# Altium PCB RADIOMASTER.PcbDoc
Units mm, origin at the board's own origin, x right, y up, seen from the top; angles counter-clockwise.
Board outline 23 x 50 mm, 2 copper layers (Top Layer, Bottom Layer); 28 components, 32 nets, 100 pads, 18 vias.
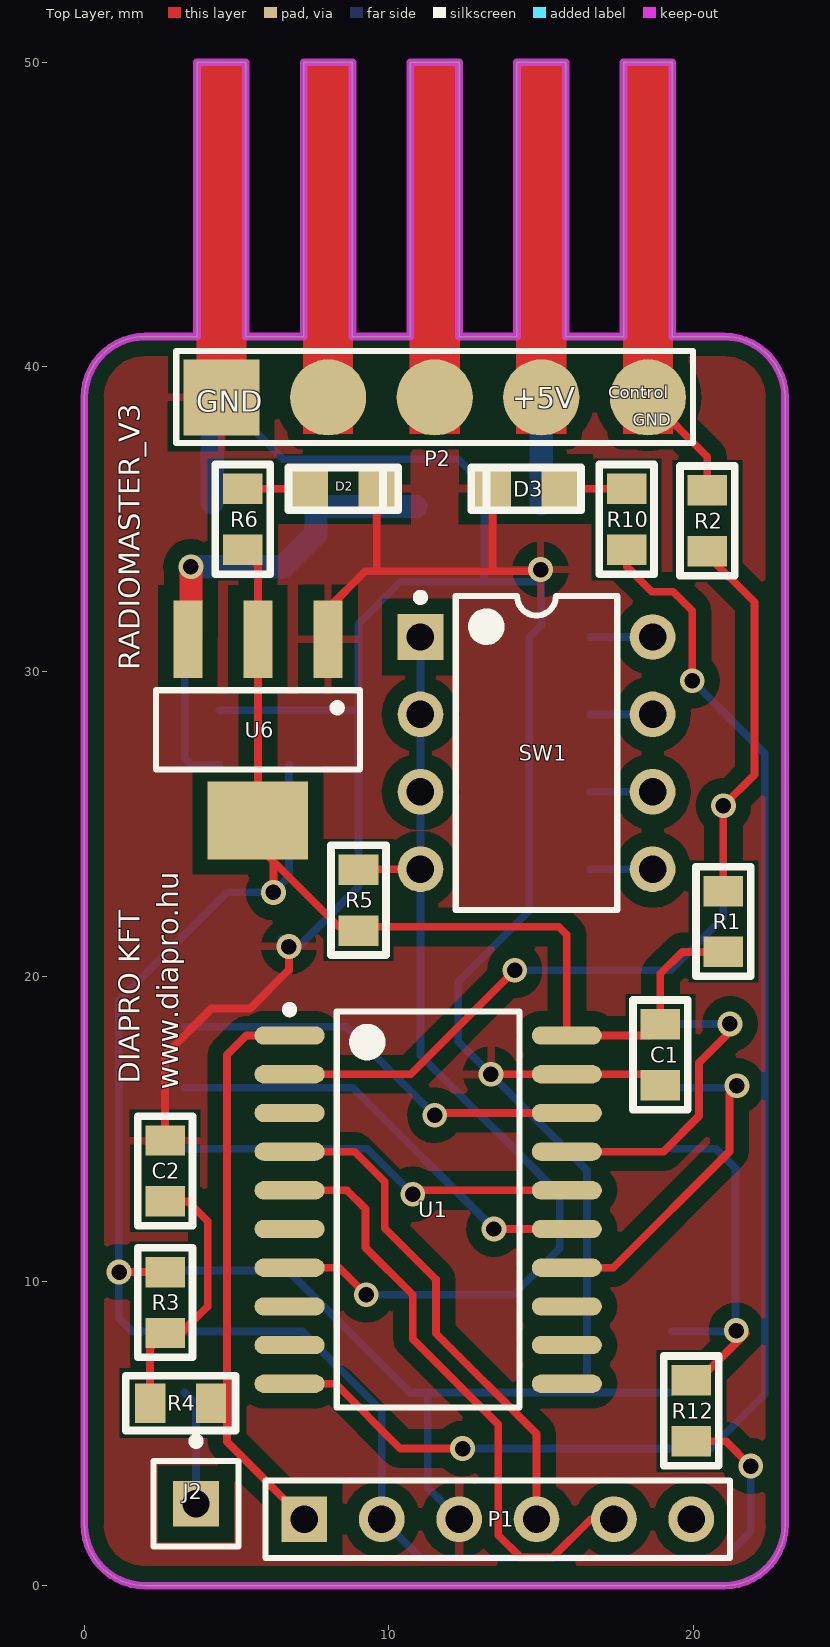
[diagram p0: Top Layer view]
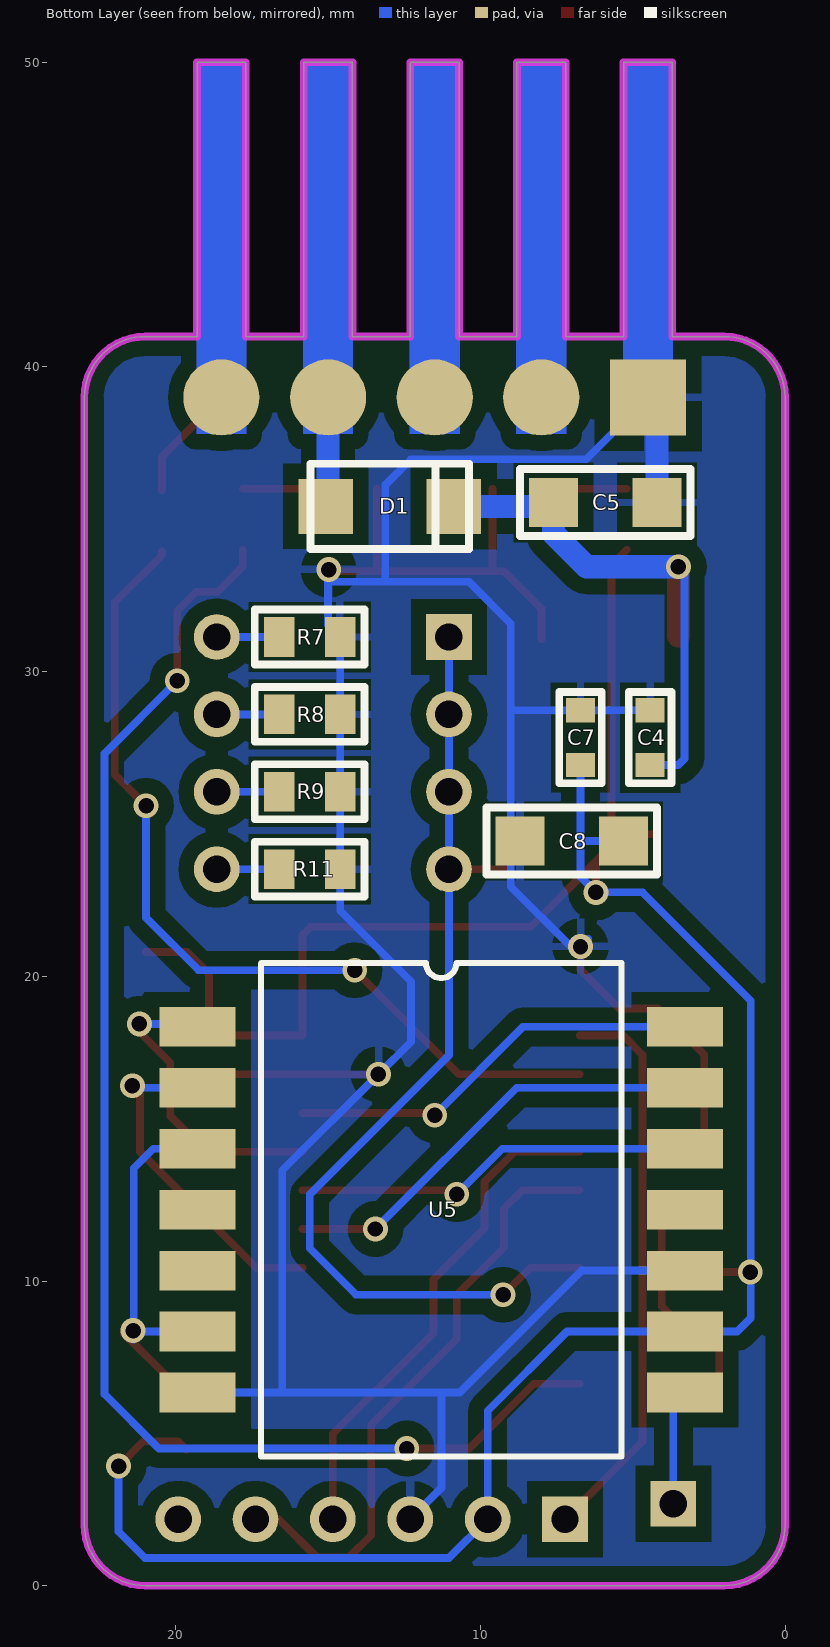
[diagram p1: Bottom Layer view, seen from below]
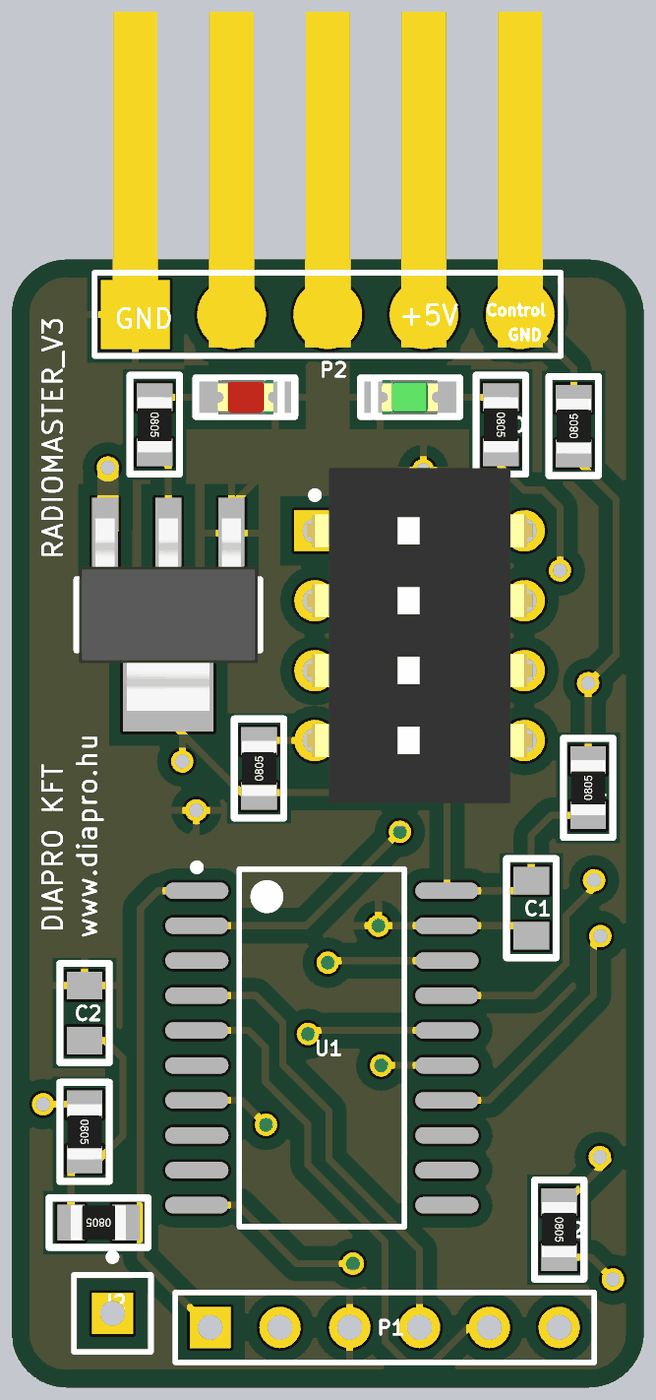
[diagram p2: 3D render of the assembled board from above, using the file's embedded part models]
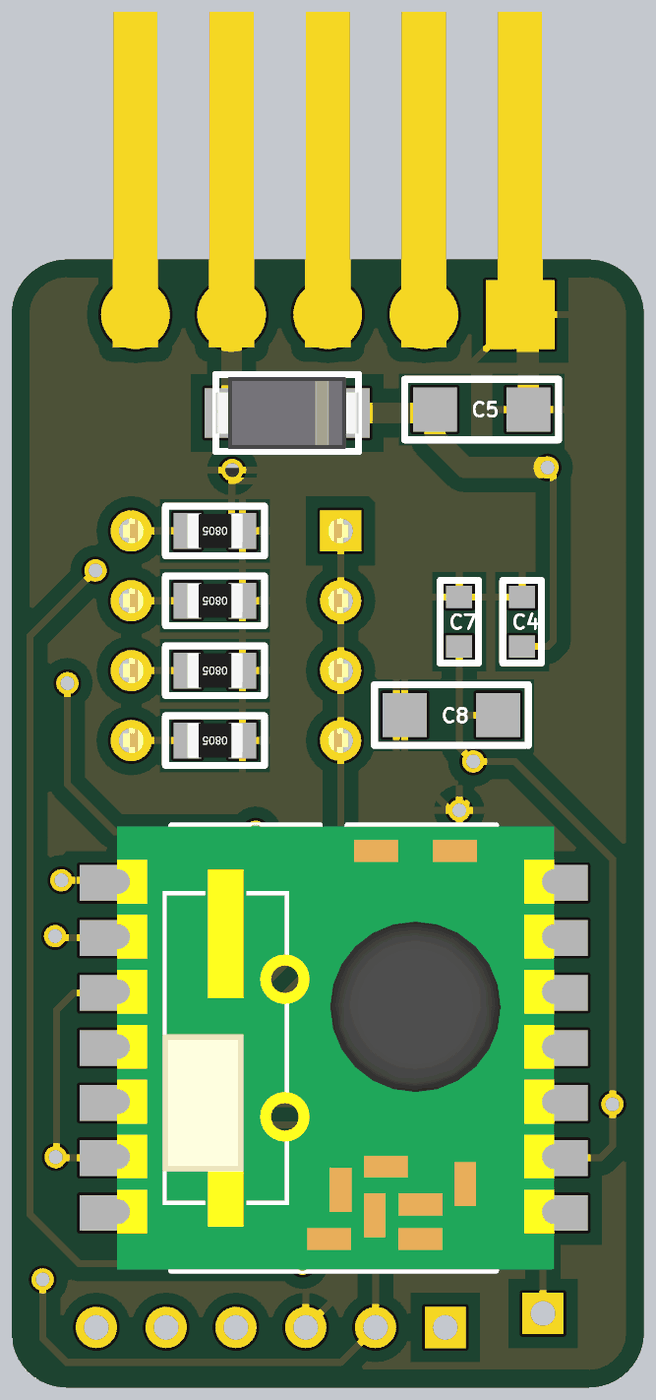
[diagram p3: 3D render of the assembled board from below, using the file's embedded part models]

## Layer stack, top to bottom
Top Layer: signal copper 0.0356
Dielectric: dielectric 0.32, FR-4, Dk 4.8
Bottom Layer: signal copper 0.0356

## Board outline
0,2 ccw(c2,2) 2,0 21,0 ccw(c21,2) 23,2 23,39 ccw(c21,39) 21,41 19.3,41 19.3,50 17.7,50 17.7,41 15.8,41 15.8,50 14.2,50 14.2,41 12.3,41 12.3,50 10.7,50 10.7,41 8.8,41 8.8,50 7.2,50 7.2,41 5.3,41 5.3,50 3.7,50 3.7,41 2,41 ccw(c2,39) 0,39

## Design rules (kind name [scope] priority, off if disabled: settings)
Clearance Clearance_to_polygon [All vs (InNamedPolygon('Bottom GND'))  or (InNamedPolygon('Top GND'))] p1: gap=0.508
Clearance [All] p2: gap=0.381
PolygonConnect [All] p1: connectstyle=Relief reliefconductorwidth=0.254 reliefentries=4 polygonreliefangle="90 Angle"
RoutingVias [All] p1: holewidth=0.508 width=0.813 viastyle="Through Hole" minholewidth=0.508 minwidth=0.813 maxholewidth=0.711 maxwidth=1.27
SilkToSilkClearance [All] p1: silktosilkclearance=0
SilkscreenOverComponentPads [All] p1: minsilkscreentomaskgap=0
SolderMaskExpansion [All] p1: expansion=0.102
Width [All] p1: maxlimit=1.524 minlimit=0.254 preferedwidth=0.254
26 further rules are at their usual default settings.

## Components (designator, comment, footprint, x,y, rotation, side; value= is the part's Value field where it differs from the comment)
C1 "100nF" FP_0805_CAP_060 18.906,17.422 r90 top
C2 "100nF" FP_0805_CAP_060 2.65,13.612 r270 top
C4 "100nF" FP_0603_CAP_080 4.428,27.836 r270 bottom
C5 "10uF" FP_1206_CAP_085 5.9,35.55 r180 bottom
C7 "100nF" FP_0603_CAP_080 6.714,27.836 r90 bottom
C8 "10uF" FP_1206_CAP_085 7,24.442 r180 bottom
D1 "DIODE_big" "FP_SMA DO214AC" 15.075,35.425 r180 bottom
D2 "LED_RED" FP_0805_LED_RED 7.5,36 r0 top
D3 "LED_GREEN" FP_0805_LED_GREEN 15.5,36 r180 top
J2 "ANT" PIN1 3.666,2.69 r0 top
P1 "Header 6" HDR1X6 7.222,2.182 r0 top
P2 "Header 5H" "SORKAPOCS 5 P RM3.81 - no3d" 11.5,39 r180 top
R1 "10k" FP_0805_RES 20.975,21.8 r90 top
R2 "100R" FP_0805_RES 20.45,34.95 r90 top
R3 "10K" FP_0805_RES 2.65,9.294 r270 top
R4 "100R" FP_0805_RES 3.158,5.992 r180 top
R5 "10k" FP_0805_RES 9,22.502 r90 top
R6 "270R" FP_0805_RES 5.2,35 r270 top
R7 "10k" FP_0805_RES 15.604,31.138 r0 bottom
R8 "10k" FP_0805_RES 15.604,28.598 r0 bottom
R9 "10k" FP_0805_RES 15.604,26.058 r0 bottom
R10 "270R" FP_0805_RES 17.8,35 r270 top
R11 "10k" FP_0805_RES 15.604,23.518 r0 bottom
R12 "10k" FP_0805_RES 19.922,5.738 r270 top
SW1 "DIPSW4" "DIP switch 4 TH" 14.842,27.328 r0 top
U1 "PIC24F16KA101-I/SO" SOIC-SO20_N 11.286,12.342 r0 top
U5 "RFM12B" RFM12B-S1 11.286,12.342 r180 bottom
U6 "LD1117xx" SUPPLY_SOT223 5.698,28.09 r270 top

## Footprints (in the part's own frame and the unit in brackets; to place one, negate y for a bottom-side part, rotate by r counter-clockwise, add the part's x,y. Pads: shape width x height; smd on the part's side, far side on the other; paste and mask are expansions set on the pad)
"DIP switch 4 TH" [mm]
  rect 1.5x1.5 hole 0.9: 1(-3.81,3.81)
  round 1.5 hole 0.9: 2(-3.81,1.27) 3(-3.81,-1.27) 4(-3.81,-3.81) 5(3.81,-3.81) 6(3.81,-1.27) 7(3.81,1.27) 8(3.81,3.81)
  silkscreen extent -3.93,-5.15 2.65,5.23, body extent -4.1,-6.1 4.1,6.1, height 5
FP_0603_CAP_080 [mm] "0.8mm magas 0603 kapacitás"
  rect 0.8x0.95 smd: 1(-0.9,0) 2(0.9,0)
  silkscreen extent -1.5,-0.7 1.5,0.7, body extent -0.8,-0.4 0.76,0.4, height 0.8
FP_0805_CAP_060 [mm] "0805 kapacitás YAGEO 0.6 mm magas"
  rect 1x1.3 smd: 1(-1,0) 2(1,0)
  silkscreen extent -1.8,-0.9 1.8,0.9, body extent -1,-0.64 1.03,0.64, height 0.6
FP_0805_LED_GREEN [mm] "0805 méretû zöld LED"
  rect 1.2x1.3 smd: A(-0.1,0) K(2.1,0)
  silkscreen extent -0.8,-0.7 2.8,0.7, body extent 0.01,-0.63 2.03,0.62, height 1.1
FP_0805_LED_RED [mm] "0805 méretû piros LED"
  rect 1.2x1.3 smd: A(-0.1,0) K(2.1,0)
  silkscreen extent -0.8,-0.7 2.8,0.7, body extent 0.01,-0.63 2.03,0.62, height 1.1
FP_0805_RES [mm] "0805 ellenállás"
  rect 1x1.3 smd: 1(-1,0) 2(1,0)
  silkscreen extent -1.8,-0.9 1.8,0.9, body extent -1,-0.62 1,0.63, height 0.62
FP_1206_CAP_085 [mm] "1206 kapacitás 0.85 mm"
  rect 1.6x1.6 smd: 1(-1.7,0) 2(1.7,0)
  silkscreen extent -2.8,-1.1 2.8,1.1, body extent -1.52,-0.79 1.58,0.79, height 0.85
"FP_SMA DO214AC" [mm] "SMA DO-214AC tok"
  rect 1.8x1.8 smd: A(0,0) K(4.2,0)
  silkscreen extent -0.5,-1.4 4.7,1.4, body extent -0.5,-1.3 4.7,1.3, height 2.42
HDR1X6 [mm] "Connector; Header; 6 Position"
  rect 1.5x1.5 hole 0.9: 1(0,0)
  round 1.5 hole 0.9: 2(2.54,0) 3(5.08,0) 4(7.62,0) 5(10.16,0) 6(12.7,0)
  silkscreen extent -1.27,-1.27 13.97,1.27
PIN1 [mm] "Connector; Plug"
  rect 1.5x1.5 hole 0.9: 1(0,0)
  silkscreen extent -1.4,-1.4 1.4,2.17
RFM12B-S1 [mm]
  rect 2.5x1.3 smd: 1(-8,6) 2(-8,4) 3(-8,2) 4(-8,0) 5(-8,-2) 6(-8,-4) 7(-8,-6) 8(8,-6) 9(8,-4) 10(8,-2) 11(8,0) 12(8,2) 13(8,4) 14(8,6)
  silkscreen extent -5.91,-8.1 5.92,8.1, body extent -7.88,-8.05 8.04,8.05, height 2.1
SOIC-SO20_N [mm] "SOIC, 20-Leads, Body 12.8x7.5mm, Pitch 1.27mm, IPC Medium Density"
  oval 2.3x0.6 smd: 1(-4.55,5.715) 2(-4.55,4.445) 3(-4.55,3.175) 4(-4.55,1.905) 5(-4.55,0.635) 6(-4.55,-0.635) 7(-4.55,-1.905) 8(-4.55,-3.175) 9(-4.55,-4.445) 10(-4.55,-5.715) 11(4.55,-5.715) 12(4.55,-4.445) 13(4.55,-3.175) 14(4.55,-1.905) 15(4.55,-0.635) 16(4.55,0.635) 17(4.55,1.905) 18(4.55,3.175) 19(4.55,4.445) 20(4.55,5.715)
  silkscreen extent -4.67,-6.5 3,6.69, body extent -3.75,-6.5 3.75,6.5, height 2.65
"SORKAPOCS 5 P RM3.81 - no3d" [mm]
  rect 2.5x2.5 all layers, no hole: 1(7,0)
  round 2.5 all layers, no hole mask+0.102: 2(3.5,0) 3(0,0) 4(-3.5,0) 5(-7,0)
  silkscreen extent -8.48,-1.52 8.48,1.5
SUPPLY_SOT223 [mm] "SOT223 package, 3 leads"
  rect 2.55x0.95 smd: 1(-2.975,2.3) 2(-2.975,0) 3(-2.975,-2.3)
  rect 2.55x3.3 smd: 2(2.975,0)
  silkscreen extent -1.3,-3.35 1.3,3.35, body extent -3.5,-3.25 3.5,3.25, height 1.65

## Part data
C1 C2 C4 C5 C7 C8: library part Cap, "Capacitor"
D2: library part LED_R, "Typical LED"
D3: library part LED_G, "Typical LED"
J2: library part Socket, "Socket"
P1: "Header, 6-Pin"
P2: "Header, 5-Pin, Right Angle"
R1 R2 R3 R4 R5 R6 R7 R8 R9 R10 R11 R12: library part Res3, "Resistor"
U1: "16-Bit Flash Microcontroller with nanoWatt XLP Technology, 16KB Flash, 1.5KB SRAM, 20-Pin SOIC, Industrial Temperature"
U5: "FM Module"
U6: "LD1117xx 3,3V lin reg"

## Via types
v1: diameter 0.813, hole 0.508, Top Layer to Bottom Layer, 18 vias

## Nets (pads, with @x,y where several pads share a name; then routed paths per layer and width w, separated by ;. In a path a pad name is that pad's centre, name@x,y a point inside that pad or via, vN(x,y) a via of type N, cw(c..) or ccw(c..) an arc to the next point about the centre after c; other vN are vias at no path point)
AN0: R1.2 R2.1 U1.2 | length 32.3
  Top Layer w0.254: U1.2 10.712,16.787 v1(14.125,20.2) ; R2.1 20.45,33.825 22,32.275 22,26.625 v1(20.975,25.6) R1.2
  Bottom Layer w0.254: v1(14.125,20.2) 19.25,20.2 20.975,21.925 v1(20.975,25.6)
AN1: U1.3
AN2: R5.2 SW1.1 SW1.2 SW1.3 SW1.4 U1.7 | length 33.8
  Top Layer w0.254: U1.7 8.365,10.437 v1(9.254,9.548) ; R5.2@9.016,23.518 SW1.4
  Bottom Layer w0.254: v1(9.254,9.548) 14.08,9.548 15.604,11.072 15.604,12.838 11.032,17.41 SW1.4 SW1.3 SW1.2 SW1.1
AN2/PGD1: P1.4 U1.4 | length 16.7
  Top Layer w0.254: U1.4 8.873,14.247 9.864,13.256 9.864,11.732 11.54,10.056 11.54,8.285 14.842,4.983 P1.4
GND: C1.1 C2.1 C4.1 C5.2 C7.2 C8.1 D2.K D3.K P1.3 P2.1 R7.1 R8.1 R9.1 R11.1 U1.19 U5.7 U5.10 U6.1 | length 119.4
  Top Layer w0.254: C2.1 2.65,17.422 4.174,18.946 5.444,18.946 6.714,20.216 v1(6.714,20.978) ; U6.1 7.998,32.073 9.225,33.3 v1@14.975,33.3 ; 9.6,33.4 D2.K ; v1(13.345,16.787) U1.19 18.541,16.787 C1.1 ; 13.4,33.325 D3.K
  Bottom Layer w0.254: U5.10 6.683,10.342 10.683,6.342 16.5,6.342 ; C4.1 C7.2 9,28.736 ; P2.1 6.525,36.975 12.275,36.975 13.125,36.125 13.125,32.95 ; v1@6.46,21.232 v1(6.714,20.978) 7.036,20.978 9,22.942 9,28.736 ; 11.275,6.325 11.275,3.209 P1.3 ; U5.7 16.5,6.342 ; 9,28.736 9,31.575 10.375,32.95 13.125,32.95 ; 13.125,32.95 15,32.95 15,31.534 R7.1 R8.1 R9.1 R11.1 14.604,22.15 12.275,19.821 12.275,17.857 v1(13.345,16.787) 16.5,13.632 16.5,6.342
  Bottom Layer w0.762: C5.2 P2.1@4.2,38.7
  other v1: 14.975,33.35
GPIO0: U1.11
GPIO1: U1.9
GPIO2: R10.2 U1.10 | length 47.4
  Top Layer w0.254: U1.10 8.248,6.627 10.375,4.5 v1(12.415,4.5) ; R10.2 17.8,33.45 18.625,32.625 19.325,32.625 19.95,32 v1(19.95,29.7) v1@20.1,29.7
  Bottom Layer w0.254: v1(12.415,4.5) 20.55,4.5 22.335,6.285 22.335,27.315 v1(19.95,29.7)
GPIO3: U1.6
GPIO4/PGC1: P1.5 U1.5 | length 19.9
  Top Layer w0.254: U1.5 8.619,12.977 9.229,12.367 9.229,11.097 10.778,9.548 10.778,8.097 13.584,5.291 13.584,1.661 14.321,0.924 15.363,0.924 16.621,2.182 P1.5
GPIO5: U1.8
M\C\L\R\: P1.1 R4.1 U1.1 | length 18.6
  Top Layer w0.254: U1.1 5.317,18.057 4.682,17.422 4.682,4.722 P1.1
MISO: U1.17 U5.1 | length 10.2
  Top Layer w0.254: U1.17 19.008,14.247 20.176,15.415 20.176,17.168 21.192,18.184 v1(21.192,18.438)
  Bottom Layer w0.254: U5.1 19.382,18.438 v1(21.192,18.438)
MOSI: U1.16 U5.12 | length 13.2
  Top Layer w0.254: v1(10.778,12.85) 10.905,12.977 U1.16
  Bottom Layer w0.254: U5.12 9.286,14.342 v1(10.778,12.85)
NetC2_2: C2.2 R3.2 R4.2 | length 8.7
  Top Layer w0.254: R4.2 2.158,7.802 R3.2 3.174,8.294 4.047,9.167 4.047,11.961 3.396,12.612 C2.2
NetD2_A: D2.A R6.1 | length 2.2
  Top Layer w0.254: R6.1 D2.A
NetD3_A: D3.A R10.1 | length 2.2
  Top Layer w0.254: D3.A R10.1
NetJ2_1: J2.1 U5.8 | length 3.8
  Bottom Layer w0.254: U5.8 3.666,5.962 J2.1
NetR7_2: R7.2 SW1.8 | length 2
  Bottom Layer w0.254: R7.2 SW1.8
NetR8_2: R8.2 SW1.7 | length 2
  Bottom Layer w0.254: R8.2 SW1.7
NetR9_2: R9.2 SW1.6 | length 2
  Bottom Layer w0.254: R9.2 SW1.6
NetR11_2: R11.2 SW1.5 | length 2
  Bottom Layer w0.254: R11.2 SW1.5
NetR12_1: R12.1 U5.3 U5.6 | length 13.5
  Top Layer w0.254: R12.1 20.16,6.738 21.7,8.278 21.603,8.375 v1@21.3,8.375
  Bottom Layer w0.254: U5.6 21.636,8.342 21.375,8.081 21.375,13.7 20.733,14.342 U5.3
  other v1: 21.4,8.375
"REL OUT": P2.5 R2.2 | length 3.9
  Top Layer w0.254: P2.5 20.45,37.05 R2.2
"RF I\R\Q\": U1.14 U5.2 | length 11.4
  Top Layer w0.254: U1.14 17.362,10.437 21.175,14.25 21.175,16.135 v1@21.446,16.406
  Bottom Layer w0.254: U5.2 21.382,16.342 v1@21.446,16.406
  other v1: 21.421,16.406
"RF S\S\": U1.18 U5.14 | length 13.8
  Top Layer w0.254: v1(11.5,15.442) 11.575,15.517 U1.18
  Bottom Layer w0.254: U5.14 8.6,18.342 v1(11.5,15.442)
SCK: U1.15 U5.13 | length 14.5
  Top Layer w0.254: v1(13.445,11.707) U1.15
  Bottom Layer w0.254: U5.13 8.81,16.342 v1(13.445,11.707)
SCL: U1.12
SDA: U1.13
VCC: C4.2 C5.1 D1.K U6.3 | length 18.7
  Top Layer w0.254: U6.3 U6.3@3.5,31.167
  Top Layer w0.762: U6.3@3.5,31.167 v1(3.5,33.442)
  Bottom Layer w0.254: v1(3.5,33.442) 3.3,33.242 3.3,27.142 3.506,26.936 C4.2
  Bottom Layer w0.762: v1(3.5,33.442) 6.517,33.442 7.6,34.525 C5.1 ; C5.1@7.725,35.425 D1.K
VCC3.3V: C1.2 C7.1 C8.2 P1.2 R1.1 R3.1 R5.1 R6.2 R12.2 U1.20 U5.9 U6.2 | length 90.3
  Top Layer w0.254: v1(1.142,10.294) R3.1 R3.1@2.904,10.294 ; U6.2@4.22,24.662 U6.2@4.658,24.662 ; R6.2 5.698,33.502 5.698,31.065 U6.2@5.698,25.115 ; v1(6.206,22.756) 6.206,23.772 ; R12.2@19.652,4.468 R12.2 21.062,4.738 v1(21.875,3.925) ; R1.1 19.625,20.8 18.906,20.081 C1.2 18.541,18.057 U1.20 15.836,21.364 15.575,21.625 8.353,21.625 6.206,23.772 ; U6.2@5.698,24.28 6.206,23.772 ; U6.2@5.698,24.28 U6.2@5.698,25.115 ; U6.2@5.698,24.28 5.28,24.697 U6.2@5.698,25.115
  Bottom Layer w0.254: C8.2 6.714,24.442 ; C7.1 6.714,24.442 ; v1(21.875,3.925) 21.875,1.775 21.012,0.912 11.032,0.912 P1.2 9.762,5.738 7.158,8.342 U5.9 1.57,8.342 1.126,8.786 1.126,19.2 4.682,22.756 v1(6.206,22.756) 6.714,23.264 6.714,24.442
VCC_5V: D1.A P2.4 | length 3.5
  Bottom Layer w0.762: D1.A@15,35.5 P2.4
pads on no net: P1.6 P2.2 P2.3 U5.4 U5.5 U5.11

## Polygon pours and split planes (outlines as drawn)
GND on Top Layer "Top GND" (solid, pour order 4): 0,41 0,0 23,0 23,41
GND on Bottom Layer "Bottom GND" (solid, pour order 6): 23,41 23,0 0,0 0,41

## Keep-outs
Keep-Out Layer:
  the board outline again, w0.254

## Other copper
Top Layer:
  rectangle net GND: 3.675,37.8 5.325,50
  rectangle: 7.175,37.8 8.825,50
  rectangle: 10.675,37.8 12.325,50
  rectangle net VCC_5V: 14.175,37.8 15.825,50
  rectangle net "REL OUT": 17.675,37.8 19.325,50
Bottom Layer:
  rectangle net GND: 3.675,37.8 5.325,50
  rectangle: 7.175,37.8 8.825,50
  rectangle: 10.675,37.8 12.325,50
  rectangle net VCC_5V: 14.175,37.8 15.825,50
  rectangle net "REL OUT": 17.675,37.8 19.325,50

## Silkscreen, mask and mechanical layers (free items; w line width, h text height)
Top Overlay:
  text "Control" at 17.2,38.975 h0.4
  text "+5V" at 14.05,38.65 h0.7
  text "GND" at 3.675,38.525 h0.7
  text "GND" at 18,38.075 h0.4
  text "RADIOMASTER_V3" at 1.825,30.05 h0.7 r90
  text "DIAPRO KFT" at 1.825,16.475 h0.7 r90
  text "www.diapro.hu" at 3.075,16.275 h0.7 r90
Top Solder:
  rectangle: 3.675,37.8 5.325,50
  rectangle: 7.175,37.8 8.825,50
  rectangle: 10.675,37.8 12.325,50
  rectangle: 14.175,37.8 15.825,50
  rectangle: 17.675,37.8 19.325,50
Bottom Solder:
  rectangle: 3.675,37.8 5.325,50
  rectangle: 7.175,37.8 8.825,50
  rectangle: 10.675,37.8 12.325,50
  rectangle: 14.175,37.8 15.825,50
  rectangle: 17.675,37.8 19.325,50